# Altium PCB PCB_Add.PcbDoc
Units mm, origin at the board's own origin, x right, y up, seen from the top; angles counter-clockwise.
Board outline 89.28 x 33.78 mm, 2 copper layers (Top Layer, Bottom Layer); 38 components, 23 nets, 112 pads, 0 vias.
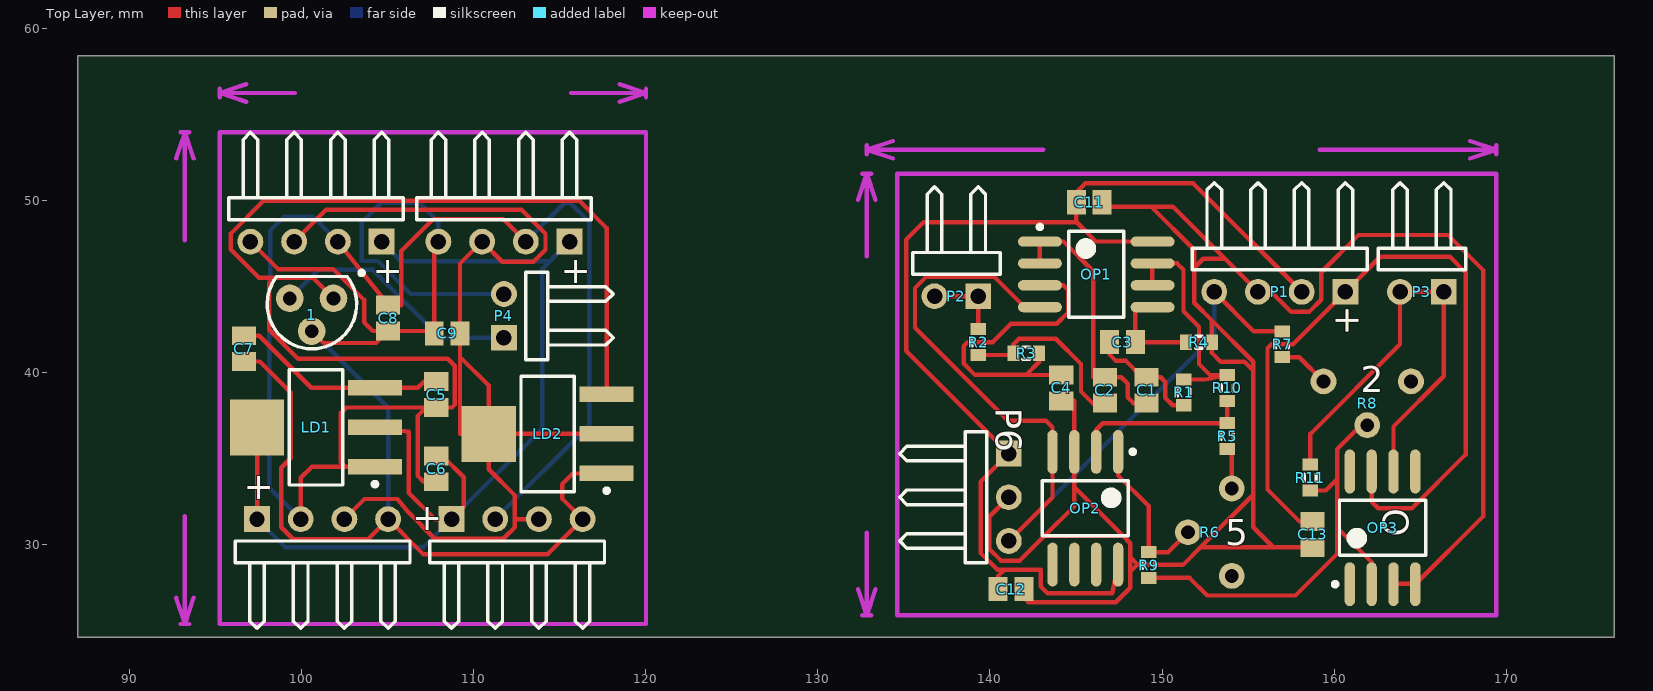
[diagram p0: Top Layer view]
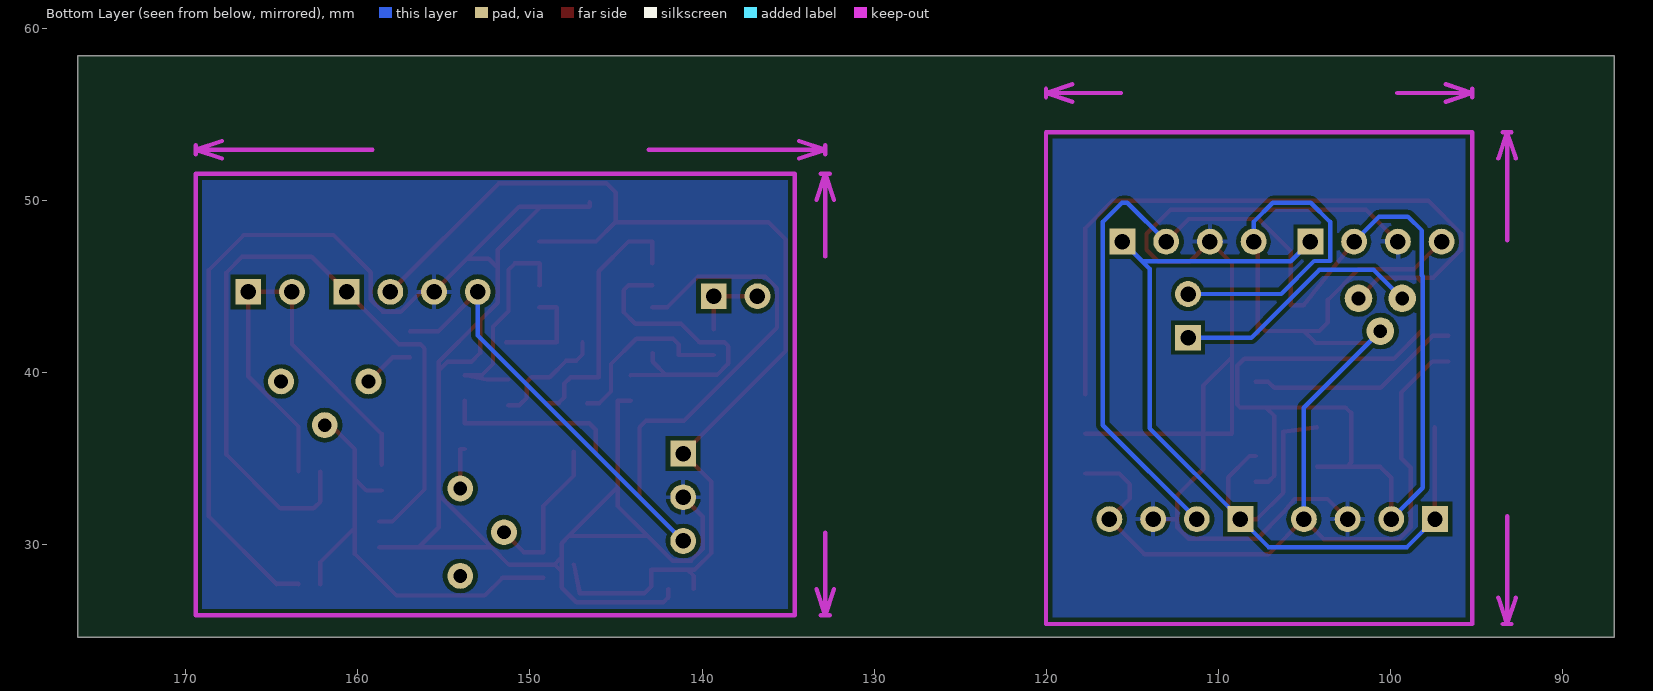
[diagram p1: Bottom Layer view, seen from below]

## Layer stack, top to bottom
Top Solder: solder mask 0.0102, Solder Resist, Dk 3.5
Top Layer: signal copper 0.0356
Dielectric 1: dielectric 0.32, FR-4, Dk 4.8
Bottom Layer: signal copper 0.0356
Bottom Solder: solder mask 0.0102, Solder Resist, Dk 3.5

## Board outline
86.995,24.638 176.276,24.638 176.276,58.42 86.995,58.42

## Design rules (kind name [scope] priority, off if disabled: settings)
Clearance [All] p1: gap=0.254
PolygonConnect [All] p1: connectstyle=Relief reliefconductorwidth=0.254 reliefentries=4 polygonreliefangle="90 Angle" airgapwidth=0.254
RoomDefinition Sch_Add [InComponentClass('Sch_Add')] p1: confinementstyle=ConfineIn formatcopy=TRUE lockcomponents=FALSE outline 0,0 50.8,0 50.8,25.4 0,25.4
RoutingVias [All] p1: holewidth=0.711 width=1.27 viastyle="Through Hole" minholewidth=0.711 minwidth=1.27 maxholewidth=0.711 maxwidth=1.27
SolderMaskExpansion [All] p1: expansion=0.102
Width [All] p1: maxlimit=0.254 minlimit=0.254 preferedwidth=0.254
30 further rules are at their usual default settings.

## Classes and differential pairs
component class Sch_Add: 1 + C5 C6 C7 C8 C9 LD1 LD2 P4 P9

## Components (designator, comment, footprint, x,y, rotation, side; value= is the part's Value field where it differs from the comment)
1 "7805" TO-92 100.457,43.942 r90 top
+ "Header 4H" HDR1X4H 115.57,47.625 r180 top (schematic designator P8)
+ "Header 4H" HDR1X4H 97.409,31.496 r0 top (schematic designator P7)
+ "Header 4H" HDR1X4H 104.648,47.625 r180 top (schematic designator P9)
+ "Header 4H" HDR1X4H 108.712,31.496 r0 top (schematic designator P5)
C1 "Cap Pol3" C0805 149.098,38.989 r90 top
C2 "Cap Pol3" C0805 146.685,38.989 r270 top
C3 "Cap Pol3" C0805 147.701,41.783 r0 top
C4 "Cap Pol3" C0805 144.145,39.116 r270 top
C5 "Cap Pol3" C0805 107.823,38.735 r270 top
C6 "Cap Pol3" C0805 107.823,34.417 r270 top
C7 "Cap Pol3" C0805 96.647,41.402 r270 top
C8 "Cap Pol3" C0805 105.029,43.18 r270 top
C9 "Cap Pol3" C0805 108.458,42.291 r180 top
C11 "Cap Pol3" C0805 145.771,49.911 r0 top
C12 "Cap Pol3" C0805 141.224,27.432 r0 top
C13 "Cap Pol3" C0805 158.75,30.607 r270 top
LD1 "LD1117" SOT230P700X180-4N 100.838,36.83 r180 top
LD2 "LD1117" SOT230P700X180-4N 114.3,36.449 r180 top
OP1 "TLV3542" SOIC127P600X175-8N 146.177,45.72 r0 top
OP2 "TLV3542" SOIC127P600X175-8N 145.542,32.131 r270 top
OP3 "O" SOIC127P600X175-8N 162.814,30.988 r90 top
P1 "Header 4H" HDR1X4H 160.655,44.704 r180 top
P2 "Header 2H" HDR1X2H 139.319,44.45 r180 top
P3 "Header 2H" HDR1X2H 166.37,44.704 r180 top
P4 "Header 2H" HDR1X2H 111.76,42.037 r90 top
P6 "Header 3H" HDR1X3H 141.097,35.306 r270 top
R1 "Res3" J1-0603 151.257,38.862 r90 top
R2 "Res3" J1-0603 139.319,41.783 r270 top
R3 "Res3" J1-0603 142.113,41.148 r180 top
R4 "Res3" J1-0603 152.146,41.783 r0 top
R5 "Res3" J1-0603 153.797,36.322 r270 top
R6 "5" 3362P 153.924,30.734 r270 top
R7 "Res3" J1-0603 156.972,41.656 r270 top
R8 "2" 3362P 161.925,39.37 r0 top
R9 "Res3" J1-0603 149.225,28.829 r270 top
R10 "Res3" J1-0603 153.797,39.116 r270 top
R11 "Res3" J1-0603 158.623,33.909 r90 top

## Footprints (in the part's own frame and the unit in brackets; to place one, negate y for a bottom-side part, rotate by r counter-clockwise, add the part's x,y. Pads: shape width x height; smd on the part's side, far side on the other; paste and mask are expansions set on the pad)
3362P [mm]
  round 1.5 hole 0.8: 1(-2.54,0.127) 2(2.54,0.127) 3(0,-2.413)
C0805 [mm] "Chip Capacitor, Body 2.0x1.3mm, IPC High Density"
  rect 1.1x1.4 smd: 1(-0.75,0) 2(0.75,0)
  body extent -1.1,-0.72 1.1,0.72, height 1.4
HDR1X2H [mm] "Connector; Header; 2 Position; Right Angle"
  rect 1.5x1.5 hole 0.9: 1(0,0)
  round 1.5 hole 0.9: 2(2.54,0)
  silkscreen extent -1.27,-6.35 3.81,-1.27
HDR1X3H [mm] "Connector; Header; 3 Position; Right Angle"
  rect 1.5x1.5 hole 0.9: 1(0,0)
  round 1.5 hole 0.9: 2(2.54,0) 3(5.08,0)
  silkscreen extent -1.27,-6.35 6.35,-1.27
HDR1X4H [mm] "Connector; Header; 4 Position; Right Angle"
  rect 1.5x1.5 hole 0.9: 1(0,0)
  round 1.5 hole 0.9: 2(2.54,0) 3(5.08,0) 4(7.62,0)
  silkscreen extent -1.27,-6.35 8.89,-1.27
J1-0603 [mm] "Chip Resistor, Body 1.6x0.8mm, IPC High Density"
  rect 0.7x0.9 smd: 1(-0.75,0) 2(0.75,0)
  silkscreen extent -0.2,-0.35 0.2,0.35, body extent -0.85,-0.48 0.85,0.48, height 0.9
SOIC127P600X175-8N [mm] "SOIC, 8-Leads, Body 4.90x3.90mm, Pitch 1.27mm, IPC Medium Density"
  oval 2.55x0.6 smd: 1(-3.275,1.905) 2(-3.275,0.635) 3(-3.275,-0.635) 4(-3.275,-1.905) 5(3.275,-1.905) 6(3.275,-0.635) 7(3.275,0.635) 8(3.275,1.905)
  silkscreen extent -3.4,-2.5 1.6,2.88, body extent -2,-2.5 2,2.5, height 1.75
SOT230P700X180-4N [mm] "SOT223, 4-Leads, Body 6.50x7.00mm (avg), Pitch 2.30mm, IPC Medium Density"
  rect 3.15x0.9 smd: 1(-3.425,2.3) 2(-3.425,0) 3(-3.425,-2.3)
  rect 3.15x3.25 smd: 4(3.425,0)
  silkscreen extent -3.55,-3.35 1.55,3.42, body extent -1.85,-3.35 1.85,3.35, height 1.8
TO-92 [mm]
  round 1.6 hole 0.8: 1(0.381,-1.397) 2(-1.524,-0.127) 3(0.381,1.143)
  silkscreen extent -2.55,-3.15 1.99,2.46, body extent -2.55,-2.75 1.65,2.47, height 5.2

## Part data
+ + + + P1: "Header, 4-Pin, Right Angle"
C1 C2 C3 C4 C5 C6 C7 C8 C9 C11 C12 C13: "Polarized Capacitor (Surface Mount)"
OP3: library part OPA388IDR
P2 P3 P4: "Header, 2-Pin, Right Angle"
P6: "Header, 3-Pin, Right Angle"
R1 R2 R3 R4 R5 R7 R9 R10 R11: "Resistor"
R6 R8: library part Res_3362P

## Nets (pads, with @x,y where several pads share a name; then routed paths per layer and width w, separated by ;. In a path a pad name is that pad's centre, name@x,y a point inside that pad or via, vN(x,y) a via of type N, cw(c..) or ccw(c..) an arc to the next point about the centre after c; other vN are vias at no path point)
+2.5V: C11.1 C12.1 OP1.8 OP2.8 P1.2 P6.1 | length 66.4
  Top Layer w0.254: C12.1 140.474,28.194 140.83,28.55 ; OP2.8 147.106,27.192 143.343,27.192 142.951,27.584 142.951,28.55 140.83,28.55 ; OP1.8 146.164,47.625 145.046,48.743 ; P1.2 151.816,51.003 145.542,51.003 145.021,50.482 C11.1 145.021,48.768 145.046,48.743 ; 140.83,28.55 140.437,28.55 139.458,29.528 139.458,33.667 P6.1 135.128,41.275 135.128,47.727 136.144,48.743 145.046,48.743
+5V: C13.1 OP3.7 P1.1 | length 44.9
  Top Layer w0.254: C13.1 157.988,31.357 156.129,33.216 156.129,41.423 156.362,41.656 157.607,41.656 P1.1 162.687,46.736 166.731,46.736 167.64,45.827 167.64,35.246 164.521,32.127 162.56,32.127 162.179,32.508 OP3.7
-2.5V: OP1.4 OP2.4 P1.4 P6.3 R7.1 | length 52.9
  Top Layer w0.254: P6.3 143.637,32.766 OP2.4 143.637,36.83 143.256,37.211 141.046,37.211 135.647,42.611 135.647,44.919 136.318,45.591 140.236,45.591 142.011,43.815 OP1.4 ; P1.4 155.333,42.406 R7.1
  Bottom Layer w0.254: P6.3 153.035,42.164 P1.4
GND: C4.2 C11.2 C12.2 C13.2 OP2.3 OP3.3 OP3.4 P1.3 P6.2 R4.2 | length 143.8
  Top Layer w0.254: P6.2 139.966,31.635 139.966,29.757 140.637,29.086 141.735,29.086 143.161,30.512 ; C12.2 141.974,26.936 142.243,26.667 147.317,26.667 148.158,27.508 148.158,28.448 ; C4.2 144.907,38.366 ; C11.2 C11.2@146.521,49.657 ; C13.2 156.464,29.857 ; OP3.3 OP3.3@163.449,27.737 ; OP3.4@164.72,27.712 168.656,31.648 ; 143.161,30.512 144.907,32.258 144.907,33.35 ; 143.161,30.512 147.745,30.512 ; 144.907,33.35 147.745,30.512 ; 144.907,33.35 OP2.3 ; OP2.3 144.907,38.366 ; OP2.3 144.907,38.366 ; C11.2@146.521,49.657 149.365,49.657 ; C11.2@146.521,49.657 149.365,49.657 ; 147.745,30.512 148.158,30.099 148.158,29.286 ; 148.158,28.448 148.547,28.837 148.607,28.837 ; 148.158,28.448 148.158,29.286 ; 148.158,29.286 148.607,28.837 ; 148.607,28.837 151.214,28.837 152.234,29.857 ; 149.365,49.657 151.867,47.156 151.867,46.089 ; 149.365,49.657 150.622,49.657 153.657,46.622 ; 151.867,46.089 152.4,46.622 153.657,46.622 ; 151.867,46.089 151.867,44.069 152.896,43.04 ; 152.234,29.857 155.296,32.918 ; 152.234,29.857 156.464,29.857 ; 152.896,43.04 R4.2 152.896,41.148 153.404,40.64 154.788,40.64 155.296,40.132 ; 152.896,43.04 155.296,40.64 155.296,40.132 ; 153.657,46.622 P1.3 156.337,44.704 157.505,43.536 158.547,43.536 159.258,44.247 159.258,45.847 161.417,48.006 166.624,48.006 168.656,45.974 168.656,31.648 ; 155.296,32.918 155.296,40.132 ; 155.296,32.918 155.296,31.025 156.464,29.857 ; OP3.3@163.449,27.737 OP3.4@164.719,27.737 ; OP3.3@163.449,27.737 OP3.4@164.719,27.737 ; OP3.4@164.719,27.737 OP3.4 164.719,27.711 168.656,31.648
NetC1_1: C1.1 C2.1 OP1.1 OP1.2 | length 22.2
  Top Layer w0.254: OP1.2 OP1.2@142.9,46.355 ; C1.1 148.336,38.239 148.006,38.569 148.006,39.37 147.637,39.739 C2.1 C2.1@145.999,39.739 ; OP1.2@142.9,46.355 142.9,46.99 ; OP1.2@142.9,46.355 142.9,46.99 ; 142.9,46.99 142.902,46.992 OP1.1 144.272,47.625 145.999,45.898 ; C2.1@145.999,39.739 145.999,45.898 ; C2.1@145.999,39.739 145.999,45.898
NetC1_2: C1.2 C3.1 R1.1 | length 6.8
  Top Layer w0.254: C3.1 146.951,41.06 147.32,40.691 147.904,40.691 148.856,39.739 C1.2 149.923,39.739 150.179,39.483 150.179,38.555 150.622,38.112 R1.1
NetC2_2: C2.2 R2.2 R3.2 | length 12.7
  Top Layer w0.254: C2.2 145.962,38.239 145.288,38.913 145.288,40.513 143.822,41.979 141.686,41.979 141.363,41.656 R3.2 R3.2@141.363,41.033 ; R3.2@141.363,41.033 R2.2 R3.2@141.363,41.033
NetC3_2: C3.2 OP1.5 R4.1 | length 8
  Top Layer w0.254: OP1.5 OP1.5@148.451,43.815 ; R4.1 C3.2 ; C3.2 OP1.5@148.451,43.815 ; C3.2 OP1.5@148.451,43.815
NetC4_1: C4.1 OP1.3 R3.1 | length 18.5
  Top Layer w0.254: R3.1 142.863,40.64 142.101,39.878 ; OP1.3 144.272,45.085 144.559,44.798 144.559,43.528 143.882,42.85 141.224,42.85 140.157,41.783 138.709,41.783 138.476,41.55 138.476,40.534 139.131,39.878 142.101,39.878 ; C4.1 142.101,39.878
NetC5_1: C5.1 C7.1 LD1.3 | length 12.6
  Top Layer w0.254: C7.1 97.536,42.152 100.558,39.13 LD1.3 106.757,39.13 107.112,39.485 C5.1
NetOP1_6: OP1.6 OP1.7 R1.2 R10.1 | length 14.9
  Top Layer w0.254: OP1.6 OP1.6@149.428,45.085 ; R1.2 152.539,39.612 R10.1 152.793,39.866 152.146,40.513 152.146,42.672 151.244,43.574 151.244,45.987 150.876,46.355 OP1.7 OP1.7@149.428,46.355 ; OP1.6@149.428,45.085 OP1.7@149.428,46.355 ; OP1.6@149.428,45.085 OP1.7@149.428,46.355
NetOP2_1: OP2.1 R6.3 R9.1 | length 9.3
  Top Layer w0.254: OP2.1 147.447,34.036 149.225,32.258 R9.1 150.356,29.579 R6.3
NetOP2_2: OP2.2 R5.1 R10.2 | length 10.4
  Top Layer w0.254: OP2.2 146.177,36.691 146.558,37.072 R5.1 R10.2
NetOP3_2: OP3.2 R8.3 R9.2 R11.1 | length 26.7
  Top Layer w0.254: R9.2 151.601,28.079 152.624,27.055 157.755,27.055 160.172,29.472 160.172,31.013 ; R11.1 159.512,33.159 160.172,33.819 ; R8.3 161.569,36.957 160.172,35.56 160.172,33.819 ; OP3.2 162.179,29.007 160.172,31.013 ; 160.172,31.013 160.172,33.819
NetOP3_6: OP3.6 P3.1 P3.2 R11.2 | length 26.4
  Top Layer w0.254: R11.2 158.623,36.449 163.83,41.656 P3.2 P3.1 166.37,39.802 163.449,36.881 OP3.6
NetP2_1: P2.1 P2.2 R2.1 | length 4.5
  Top Layer w0.254: P2.2 P2.1 R2.1
NetR5_2: R5.2 R6.1 | length 4.8
  Top Layer w0.254: R5.2 R5.2@154.051,35.572 ; R5.2@154.051,35.572 R6.1 R5.2@154.051,35.572
NetR7_2: R7.2 R8.1 | length 3
  Top Layer w0.254: R7.2 157.976,40.906 R8.1
P+2.5V: 1.1 +.2 C5.2 C6.2 C8.1 LD1.1 LD2.3 | length 188.7
  Top Layer w0.254: +.2@99.949,31.496 99.949,33.895 100.584,34.53 102.554,34.53 ; 1.1 100.66,45.517 ; +.2@102.108,47.625 C8.1 105.791,43.93 ; LD1.1 102.554,34.53 ; +.2@113.03,47.625 111.722,48.933 107.644,48.933 105.791,47.08 ; 95.891,48.097 97.791,49.997 ; 95.891,48.097 95.891,47.146 97.52,45.517 ; 95.891,48.097 97.791,49.997 ; 97.52,45.517 98.425,45.517 ; 97.52,45.517 100.66,45.517 ; 97.791,49.997 116.144,49.997 ; 97.791,49.997 116.144,49.997 ; 98.425,45.517 98.12,45.212 98.12,42.494 99.797,40.818 108.498,40.818 108.904,40.411 108.904,38.152 108.737,37.985 C5.2 ; 98.425,45.517 100.66,45.517 ; 102.554,34.53 102.286,34.798 102.286,37.668 102.603,37.985 C5.2@107.239,37.985 ; 105.791,43.93 105.791,47.08 ; 105.791,43.93 105.791,47.08 ; 106.741,34.026 106.741,37.487 ; 106.741,34.026 107.1,33.667 ; 106.741,34.026 106.741,37.487 ; 106.741,37.487 C5.2@107.239,37.985 ; 107.1,33.667 C6.2 107.1,33.667 ; C5.2@107.239,37.985 C5.2 ; C5.2@107.239,37.985 C5.2 ; 116.144,49.997 117.725,48.416 ; 116.144,49.997 117.725,48.416 ; 117.725,48.416 LD2.3 117.725,48.416
  Bottom Layer w0.254: +.2@99.949,31.496 98.12,33.325 98.12,45.618 98.171,45.669 98.171,48.26 98.984,49.073 100.66,49.073 +.2@102.108,47.625 ; +.2@111.252,31.496 116.713,36.957 116.713,48.768 115.595,49.886 115.291,49.886 +.2@113.03,47.625
P+5V: +.1 C6.1 LD1.2 LD1.4 | length 60.7
  Top Layer w0.254: +.1@97.409,31.496 97.413,31.5 LD1.4 ; LD1.2 106.223,36.576 106.223,33.02 107.747,31.496 108.712,31.496 109.423,32.207 109.423,33.934 108.191,35.167 C6.1
  Bottom Layer w0.254: +.1@97.409,31.496 99.035,29.87 107.086,29.87 108.712,31.496 113.995,36.779 113.995,46.05 114.427,46.482 ; +.1@104.648,47.625 105.791,46.482 114.427,46.482 ; +.1@115.57,47.625 114.427,46.482
P+9V: 1.3 P4.1 | length 14.8
  Bottom Layer w0.254: 1.3 100.977,45.986 104.128,45.986 108.077,42.037 P4.1
P-2.5V: 1.2 +.4 C7.2 C8.2 C9.2 LD2.1 P4.2 | length 92.3
  Top Layer w0.254: C7.2 97.574,40.652 99.373,38.853 99.373,35.035 98.817,34.478 98.817,31.024 99.513,30.328 103.861,30.328 105.029,31.496 107.061,29.464 114.3,29.464 116.332,31.496 115.138,32.69 115.138,33.528 115.759,34.149 LD2.1 ; +.4@97.028,47.625 98.628,46.025 101.841,46.025 103.632,44.233 103.632,42.938 104.14,42.43 C8.2 ; 1.2 101.272,41.73 104.329,41.73 C8.2 ; C9.2 C9.2@107.708,42.875 ; +.4@107.95,47.625 107.708,47.383 C9.2@107.708,42.875 ; C8.2 C9.2@107.263,42.43 ; C9.2@107.263,42.43 107.416,42.583 C9.2@107.708,42.875 ; C9.2@107.263,42.43 C9.2@107.708,42.875
  Bottom Layer w0.254: 1.2 105.029,37.973 +.4@105.029,31.496 ; +.4@107.95,47.625 107.95,48.768 106.832,49.886 104.623,49.886 103.505,48.768 103.505,46.494 104.433,46.494 106.35,44.577 P4.2
PGND: +.3 C9.1 LD2.2 LD2.4 | length 71.7
  Top Layer w0.254: +.3@99.568,47.625 101.422,49.479 112.776,49.479 114.171,48.084 114.171,47.144 113.484,46.457 111.658,46.457 110.49,47.625 109.208,46.343 C9.1 ; +.3@102.489,31.496 103.657,32.664 105.562,32.664 105.588,32.639 106.197,31.902 107.745,30.355 111.724,30.355 112.395,31.026 112.395,31.496 ; +.3@113.792,31.496 112.395,31.496 ; LD2.2 LD2.4 ; 109.208,36.449 LD2.4 ; 109.208,36.449 109.208,40.924 ; 109.208,36.449 C9.1 ; 109.208,40.924 110.875,39.257 LD2.4 ; 109.208,40.924 C9.1 ; LD2.4 110.875,34.388 112.395,32.868 112.395,31.496
pads on no net: OP2.5 OP2.6 OP2.7 OP3.1 OP3.5 OP3.8 R6.2 R8.2

## Polygon pours and split planes (outlines as drawn)
GND on Bottom Layer "GND" (solid, pour order 3): 134.62,51.562 134.62,25.908 169.418,25.908 169.418,51.562
PGND on Bottom Layer "PGND" (solid, pour order 1): 95.377,25.527 119.888,25.527 119.888,53.848 95.377,53.848

## Keep-outs
Keep-Out Layer:
  lines w0.254: 92.71,26.924 93.218,25.4 ; 92.71,52.451 93.218,53.975 ; 92.964,25.4 93.472,25.4 ; 92.964,53.975 93.472,53.975 ; 93.218,31.664 93.218,25.4 ; 93.218,47.711 93.218,53.975 ; 93.726,26.924 93.218,25.4 ; 93.726,52.451 93.218,53.975 ; 95.25,56.007 95.25,56.515 ; 96.774,55.753 95.25,56.261 ; 96.774,56.769 95.25,56.261 ; 99.609,56.261 95.25,56.261 ; 115.656,56.261 120.015,56.261 ; 118.491,55.753 120.015,56.261 ; 118.491,56.769 120.015,56.261 ; 120.015,56.007 120.015,56.515 ; 132.334,27.432 132.842,25.908 ; 132.334,50.038 132.842,51.562 ; 132.588,25.908 133.096,25.908 ; 132.588,51.562 133.096,51.562 ; 132.842,30.711 132.842,25.908 ; 132.842,46.759 132.842,51.562 ; 132.842,52.705 132.842,53.213 ; 133.35,27.432 132.842,25.908 ; 133.35,50.038 132.842,51.562 ; 134.366,52.451 132.842,52.959 ; 134.366,53.467 132.842,52.959 ; 143.106,52.959 132.842,52.959 ; 159.154,52.959 169.418,52.959 ; 167.894,52.451 169.418,52.959 ; 167.894,53.467 169.418,52.959 ; 169.418,52.705 169.418,53.213 ; 95.25,25.4 120.015,25.4 120.015,53.975 95.25,53.975 95.25,25.4 ; 134.62,25.908 169.418,25.908 169.418,51.562 139.573,51.562 136.144,51.562 134.62,51.562 134.62,25.908
  text "24.765 (mm)" at 99.863,55.347 h1.52
  text "36.576 (mm)" at 143.36,52.045 h1.52
  text "28.575 (mm)" at 94.132,31.918 h1.52 r90
  text "25.654 (mm)" at 133.756,30.965 h1.52 r90

## Silkscreen, mask and mechanical layers (free items; w line width, h text height)
Top Overlay:
  text "+" at 161.417,42.164 h1.52 r90
Mechanical 13:
  lines w0.254: 86.995,24.638 108.966,24.638 176.276,24.638 176.276,58.42 86.995,58.42 86.995,24.638